# Altium PCB STM32F407ZGT6-尺寸图.PcbDoc
Units mm, origin at the board's own origin, x right, y up, seen from the top; angles counter-clockwise.
Board outline 74.56 x 102.5 mm, 2 copper layers (Top Layer, Bottom Layer); 33 components, 150 nets, 524 pads, 0 vias.
Unrouted connection lines stored in the file: 85.
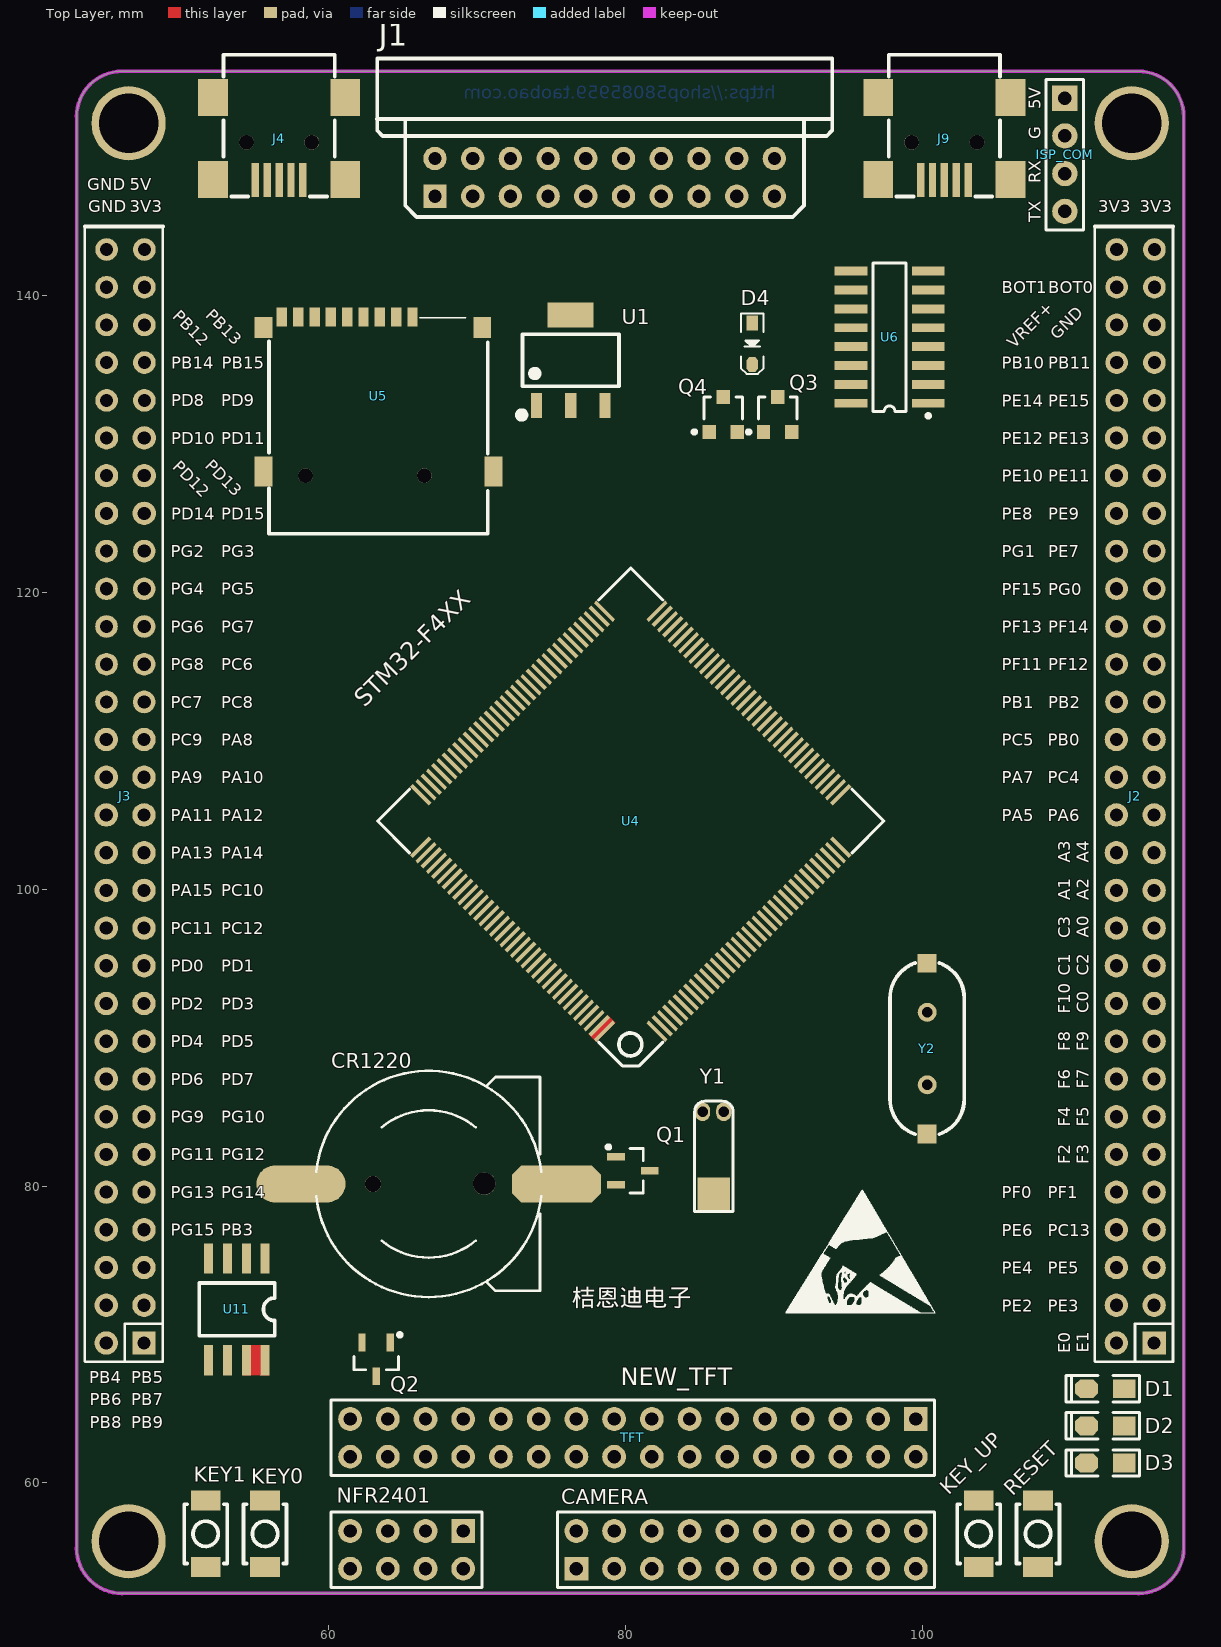
[diagram p0: Top Layer view]
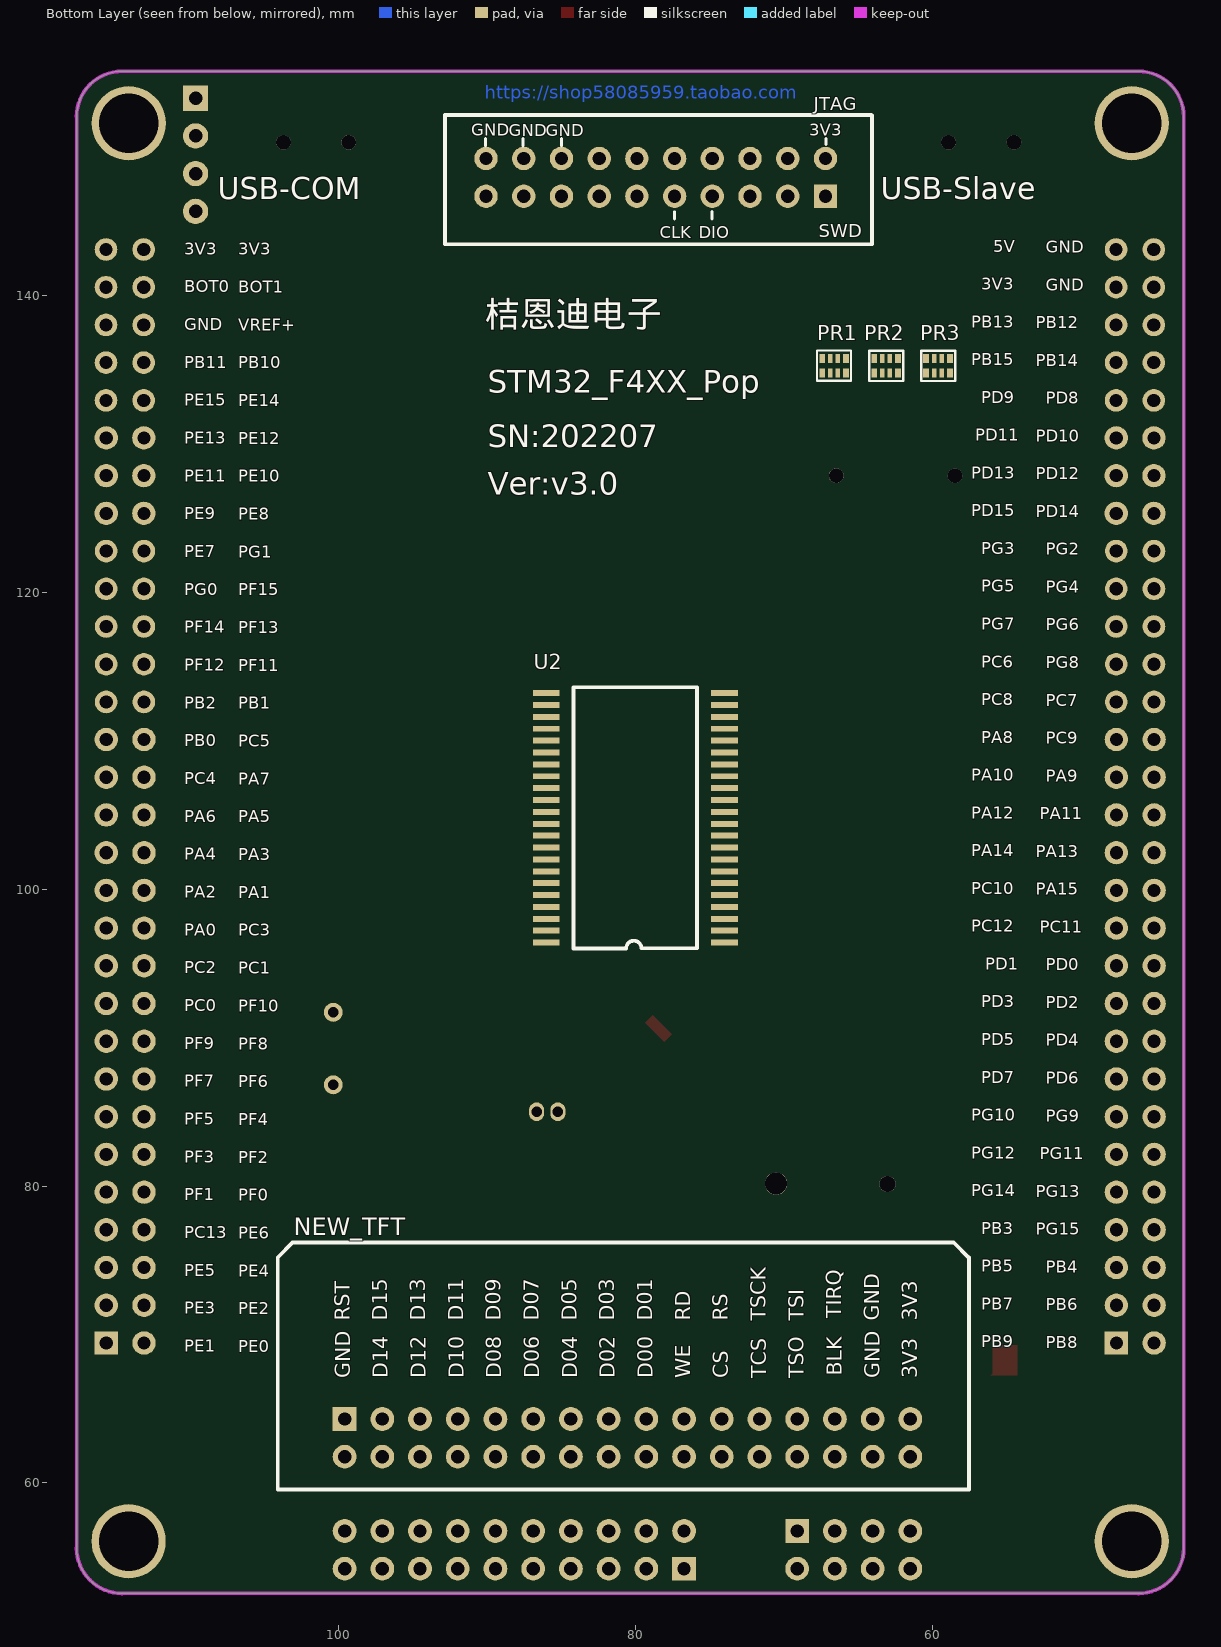
[diagram p1: Bottom Layer view, seen from below]

## Layer stack, top to bottom
Top Solder: solder mask 0.0102, Solder Resist, Dk 3.5
Top Layer: signal copper 0.0356
Dielectric 1: dielectric 0.32, FR-4, Dk 4.8
Bottom Layer: signal copper 0.0356
Bottom Solder: solder mask 0.0102, Solder Resist, Dk 3.5

## Board outline
43.053,55.617 43.053,152.017 cw(c46.103,152.017) 46.103,155.067 114.563,155.067 cw(c114.563,152.017) 117.613,152.017 117.613,55.617 cw(c114.563,55.617) 114.563,52.567 77.481,52.567 46.103,52.567 cw(c46.103,55.617)

## Design rules (kind name [scope] priority, off if disabled: settings)
Clearance [All] p1: gap=0.15 ignorepadtopadclearanceinfootprint=FALSE
ComponentClearance [All] p1: gap=0 collisioncheckmode=3 verticalgap=0 showdistances=FALSE
DiffPairsRouting [All] p1: maxlimit=0.254 minlimit=0.2 mostfreqgap=0.254 toplayer_minwidth=0.2 toplayer_maxwidth=10 toplayer_prefwidth=0.381 bottomlayer_minwidth=0.2 bottomlayer_maxwidth=10 bottomlayer_prefwidth=0.381 maxuncoupledlength=12.7
HoleSize [All] p1: absolutevalues=TRUE maxlimit=5 minlimit=0 maxpercent=80.000 minpercent=20.000
HoleToHoleClearance [All] p1: gap=0 allowstackedmicrovias=TRUE
MatchedLengths DiffPair_MatchedLengths [InDifferentialPair ('USB')] p1: tolerance=0.127 checknetsindiffpair=TRUE checkdiffpairvsdiffpair=FALSE checkxsignals=FALSE checkothers=FALSE
MatchedLengths DiffPair_USBMatchedLengths [InDifferentialPair ('USB')] p2: tolerance=0.127 checknetsindiffpair=TRUE checkdiffpairvsdiffpair=FALSE checkxsignals=FALSE checkothers=FALSE
MatchedLengths DiffPair_USBMatchedLengths_1 [InDifferentialPairClass('USB')] p3: tolerance=0.127 checknetsindiffpair=TRUE checkdiffpairvsdiffpair=FALSE checkxsignals=FALSE checkothers=FALSE
MinimumSolderMaskSliver [All] p1: minsoldermaskwidth=0
PolygonConnect [All] p1: thpad.connectstyle=Relief thpad.reliefconductorwidth=0.254 thpad.reliefentries=4 thpad.polygonreliefangle="90 Angle" thpad.airgapwidth=0.254 smdpad.connectstyle=Relief smdpad.reliefconductorwidth=0.254 smdpad.reliefentries=4 smdpad.polygonreliefangle="90 Angle" smdpad.airgapwidth=0.254 via.connectstyle=Direct via.reliefconductorwidth=0.254 via.reliefentries=4 via.polygonreliefangle="90 Angle" via.airgapwidth=0.254
RoutingVias [All] p1: holewidth=0.3 width=0.5 viastyle="Through Hole" minholewidth=0.3 minwidth=0.5 maxholewidth=0.5 maxwidth=0.8
SilkToSilkClearance [All] p1: silktosilkclearance=0
SilkToSolderMaskClearance [IsPad] p1: minsilkscreentomaskgap=0 clearancetoexposedcopper=TRUE
SolderMaskExpansion [All] p1: expansion=0.102 istentingtop=FALSE
Width [All] p1: maxlimit=2 minlimit=0.2 preferedwidth=0.25 minimp=50.000000 maximp=50.000000 favimp=50.000000
23 further rules are at their usual default settings.

## Classes and differential pairs
component class STM32F407ZGT6: CAMERA CR1220 D1 D2 D3 D4 ISP_COM J1 J2 J3 J4 J9 KEY0 KEY1 KEY_UP NFR2401 PR1 PR2 PR3 Q2 Q3 Q4 RESET TFT U1 U2 U5 U6 U11 Y1
differential pair USB: +USB_D+ -USB_D-
differential pair NewDifferentialPair1: +USB_D+ -5V

## Components (designator, comment, footprint, x,y, rotation, side; value= is the part's Value field where it differs from the comment)
CAMERA "Header 2X10" HDR-10X2 76.708,54.229 r0 top
CR1220 "BATT" BATM 66.76,80.137 r90 top
D1 "LED" "LED 0805B" 112.332,66.349 r180 top
D2 "LED" "LED 0805B" 112.332,63.849 r180 top
D3 "LED" "LED 0805B" 112.332,61.349 r180 top
D4 "1N4148" SOD-323 88.555,136.717 r270 top
ISP_COM "HDR-1X4" HDR-1X4 109.601,153.257 r270 top locked
J1 "JTAG" JTAG_20 78.613,147.923 r0 top locked
J2 "IO_30X2" PCBComponent_1 117.01,69.429 r90 top
J3 "IO_30X2" PCBComponent_1 48.99,69.429 r90 top
J4 "MiniUSB" MiniUSB 56.681,151.745 r180 top locked
J9 "MiniUSB" MiniUSB 101.478,151.745 r180 top locked
KEY0 "KEY0" "3*4 两脚开关" 55.742,54.328 r90 top
KEY1 "KEY0" "3*4 两脚开关" 51.742,54.328 r90 top
KEY_UP "KEY_UP" "3*4 两脚开关" 103.798,54.328 r90 top
NFR2401 "Header 4X2" HDR-4X2 69.088,56.769 r180 top
PR1 "4*1K" RCA-8P4R-0402 66.6,135.239 r0 bottom
PR2 "4*1K" RCA-8P4R-0402 63.1,135.239 r180 bottom
PR3 "4*1K" RCA-8P4R-0402 59.6,135.239 r180 bottom
Q1 "BAT54C" SOT23-3N 80.51,81.026 r270 top
Q2 "9012" SOT23-3N 63.222,68.326 r180 top
Q3 "9013" SOT-23R 90.26,131.826 r0 top
Q4 "9013" SOT-23R 86.598,131.826 r0 top
RESET "KEY_M" "3*4 两脚开关" 107.798,58.828 r270 top
TFT "J6" HDR-16X2 99.568,64.309 r180 top
U1 "AMS1117-3V3" SOT223_L 76.327,135.606 r0 top
U2 "SDRAM" TSOP44 73.996,96.393 r0 bottom
U4 "STM32F407ZGT6" LQFP144 82.131,90.437 r135 top
U5 "MiniSD" SD 55.631,128.12 r0 top locked
U6 "CH340G" SOP16M 97.798,137.16 r90 top
U11 "W25Q16" SOIC-8 55.753,75.126 r270 top
Y1 "32.768K" XTAL32 86.632,85.002 r270 top
Y2 "8MHz" XTAL_US 100.33,91.694 r270 top

## Footprints (in the part's own frame and the unit in brackets; to place one, negate y for a bottom-side part, rotate by r counter-clockwise, add the part's x,y. Pads: shape width x height; smd on the part's side, far side on the other; paste and mask are expansions set on the pad)
"3*4 两脚开关" [mm]
  rect 1.35x2 smd: 1(0,0) 2(4.5,0)
  silkscreen extent 0.25,-1.45 4.25,1.45
BATM [mm]
  round 1.1 hole 1.1 unplated: 0(0,3.748)
  round 1.5 hole 1.5 unplated: 0(0.025,-3.752)
  oct 2.5x6 smd: 1(0,-8.602)
  oval 2.5x6 smd: 2(0,8.598)
  silkscreen extent -7.62,-7.58 7.62,7.57
HDR-1X4 [mm] "排针，4脚"
  rect 1.7x1.7 hole 0.9: 1(0,0)
  round 1.7 hole 0.9: 2(2.54,0) 3(5.08,0) 4(7.62,0)
  silkscreen extent -1.27,-1.27 8.89,1.27, body extent -1.27,-1.27 8.89,1.27, height 8.5
HDR-4X2 [mm] "双排排针，4x2脚"
  rect 1.6x1.6 hole 0.9: 1(0,0)
  round 1.6 hole 0.9: 2(0,2.54) 3(2.54,0) 4(2.54,2.54) 5(5.08,0) 6(5.08,2.54) 7(7.62,0) 8(7.62,2.54)
  silkscreen extent -1.27,-1.27 8.89,3.81, body extent -1.27,-1.27 8.89,3.81, height 8.5
HDR-10X2 [mm] "双排排针，10x2脚"
  rect 1.6x1.6 hole 0.9: 1(0,0)
  round 1.6 hole 0.9: 2(0,2.54) 3(2.54,0) 4(2.54,2.54) 5(5.08,0) 6(5.08,2.54) 7(7.62,0) 8(7.62,2.54) 9(10.16,0) 10(10.16,2.54) 11(12.7,0) 12(12.7,2.54) 13(15.24,0) 14(15.24,2.54) 15(17.78,0) 16(17.78,2.54) 17(20.32,0) 18(20.32,2.54) 19(22.86,0) 20(22.86,2.54)
  silkscreen extent -1.27,-1.27 24.13,3.81, body extent -1.27,-1.27 24.13,3.81, height 8.5
HDR-16X2 [mm] "双排排针，16x2脚"
  rect 1.6x1.6 hole 0.9: 1(0,0)
  round 1.6 hole 0.9: 2(0,2.54) 3(2.54,0) 4(2.54,2.54) 5(5.08,0) 6(5.08,2.54) 7(7.62,0) 8(7.62,2.54) 9(10.16,0) 10(10.16,2.54) 11(12.7,0) 12(12.7,2.54) 13(15.24,0) 14(15.24,2.54) 15(17.78,0) 16(17.78,2.54) 17(20.32,0) 18(20.32,2.54) 19(22.86,0) 20(22.86,2.54) 21(25.4,0) 22(25.4,2.54) 23(27.94,0) 24(27.94,2.54) 25(30.48,0) 26(30.48,2.54) 27(33.02,0) 28(33.02,2.54) 29(35.56,0) 30(35.56,2.54) 31(38.1,0) 32(38.1,2.54)
  silkscreen extent -1.27,-1.27 39.37,3.81, body extent -1.27,-1.27 39.37,3.81, height 8.5
JTAG_20 [mil]
  rect 62x62 hole 35: 1(-450,-50)
  round 62 hole 35: 2(-450,50) 3(-350,-50) 4(-350,50) 5(-250,-50) 6(-250,50) 7(-150,-50) 8(-150,50) 9(-50,-50) 10(-50,50) 11(50,-50) 12(50,50) 13(150,-50) 14(150,50) 15(250,-50) 16(250,50) 17(350,-50) 18(350,50) 19(450,-50) 20(450,50)
  silkscreen extent -604,-105 604,315
"LED 0805B" [mil] "蓝色0805LED"
  rect 60x50 smd: 1(-50,0)
  oct 60x50 smd: 2(50,0)
  silkscreen extent -90,-35 105,35, body extent -39,-25 39,25, height 32
LQFP144 [mm]
  rect 1.8x0.254 smd: 1(-0.009,0.001) 2(-0.009,-0.499) 3(-0.009,-0.999) 4(-0.009,-1.499) 5(-0.009,-1.999) 6(-0.009,-2.499) 7(-0.009,-2.999) 8(-0.009,-3.499) 9(-0.009,-3.999) 10(-0.009,-4.499) 11(-0.009,-4.999) 12(-0.009,-5.499) 13(-0.009,-5.999) 14(-0.009,-6.499) 15(-0.009,-6.999) 16(-0.009,-7.499) 17(-0.009,-7.999) 18(-0.009,-8.499) 19(-0.009,-8.999) 20(-0.009,-9.499) 21(-0.009,-9.999) 22(-0.009,-10.499) 23(-0.009,-10.999) 24(-0.009,-11.499) 25(-0.009,-11.999) 26(-0.009,-12.499) 27(-0.009,-12.999) 28(-0.009,-13.499) 29(-0.009,-13.999) 30(-0.009,-14.499) 31(-0.009,-14.999) 32(-0.009,-15.499) 33(-0.009,-15.999) 34(-0.009,-16.499) 35(-0.009,-16.999) 36(-0.009,-17.499) 73(22.491,-17.499) 74(22.491,-16.999) 75(22.491,-16.499) 76(22.491,-15.999) 77(22.491,-15.499) 78(22.491,-14.999) 79(22.491,-14.499) 80(22.491,-13.999) 81(22.491,-13.499) 82(22.491,-12.999) 83(22.491,-12.499) 84(22.491,-11.999) 85(22.491,-11.499) 86(22.491,-10.999) 87(22.491,-10.499) 88(22.491,-9.999) 89(22.491,-9.499) 90(22.491,-8.999) 91(22.491,-8.499) 92(22.491,-7.999) 93(22.491,-7.499) 94(22.491,-6.999) 95(22.491,-6.499) 96(22.491,-5.999) 97(22.491,-5.499) 98(22.491,-4.999) 99(22.491,-4.499) 100(22.491,-3.999) 101(22.491,-3.499) 102(22.491,-2.999) 103(22.491,-2.499) 104(22.491,-1.999) 105(22.491,-1.499) 106(22.491,-0.999) 107(22.491,-0.499) 108(22.491,0.001)
  rect 0.254x1.8 smd: 37(2.491,-19.999) 38(2.991,-19.999) 39(3.491,-19.999) 40(3.991,-19.999) 41(4.491,-19.999) 42(4.991,-19.999) 43(5.491,-19.999) 44(5.991,-19.999) 45(6.491,-19.999) 46(6.991,-19.999) 47(7.491,-19.999) 48(7.991,-19.999) 49(8.491,-19.999) 50(8.991,-19.999) 51(9.491,-19.999) 52(9.991,-19.999) 53(10.491,-19.999) 54(10.991,-19.999) 55(11.491,-19.999) 56(11.991,-19.999) 57(12.491,-19.999) 58(12.991,-19.999) 59(13.491,-19.999) 60(13.991,-19.999) 61(14.491,-19.999) 62(14.991,-19.999) 63(15.491,-19.999) 64(15.991,-19.999) 65(16.491,-19.999) 66(16.991,-19.999) 67(17.491,-19.999) 68(17.991,-19.999) 69(18.491,-19.999) 70(18.991,-19.999) 71(19.491,-19.999) 72(19.991,-19.999) 109(19.991,2.501) 110(19.491,2.501) 111(18.991,2.501) 112(18.491,2.501) 113(17.991,2.501) 114(17.491,2.501) 115(16.991,2.501) 116(16.491,2.501) 117(15.991,2.501) 118(15.491,2.501) 119(14.991,2.501) 120(14.491,2.501) 121(13.991,2.501) 122(13.491,2.501) 123(12.991,2.501) 124(12.491,2.501) 125(11.991,2.501) 126(11.491,2.501) 127(10.991,2.501) 128(10.491,2.501) 129(9.991,2.501) 130(9.491,2.501) 131(8.991,2.501) 132(8.491,2.501) 133(7.991,2.501) 134(7.491,2.501) 135(6.991,2.501) 136(6.491,2.501) 137(5.991,2.501) 138(5.491,2.501) 139(4.991,2.501) 140(4.491,2.501) 141(3.991,2.501) 142(3.491,2.501) 143(2.991,2.501) 144(2.491,2.501)
  silkscreen extent -0.81,-20.8 23.29,3.3
MiniUSB [mm]
  rect 0.5x2.3 smd: 1(-1.611,4.005) 2(-0.811,4.005) 3(-0.011,4.005) 4(0.789,4.005) 5(1.589,4.005)
  rect 2x2.5 smd: 6(-4.461,-1.545) 7(-4.461,3.955) 8(4.439,-1.545) 9(4.439,3.955)
  round 1 hole 1 unplated: ""(-2.211,1.455) ""(2.189,1.455)
  silkscreen extent -3.76,-4.45 3.74,5.11
PCBComponent_1 [mil]
  rect 62x62 hole 35: 1(0,55)
  round 62 hole 35: 2(0,155) 3(100,55) 4(100,155) 5(200,55) 6(200,155) 7(300,55) 8(300,155) 9(400,55) 10(400,155) 11(500,55) 12(500,155) 13(600,55) 14(600,155) 15(700,55) 16(700,155) 17(800,55) 18(800,155) 19(900,55) 20(900,155) 21(1000,55) 22(1000,155) 23(1100,55) 24(1100,155) 25(1200,55) 26(1200,155) 27(1300,55) 28(1300,155) 29(1400,55) 30(1400,155) 31(1500,55) 32(1500,155) 33(1600,55) 34(1600,155) 45(2199.57,54.57) 46(2199.57,154.57) 47(2299.57,54.57) 48(2299.57,154.57) 49(2399.57,54.57) 50(2399.57,154.57)
  round 60 hole 35: 35(1699.57,54.57) 36(1699.57,154.57) 37(1799.57,54.57) 38(1799.57,154.57) 39(1899.57,54.57) 40(1899.57,154.57) 41(1999.57,54.57) 42(1999.57,154.57) 43(2099.57,54.57) 44(2099.57,154.57) 51(2499.15,54.15) 52(2499.15,154.15) 53(2599.15,54.15) 54(2599.15,154.15) 55(2699.15,54.15) 56(2699.15,154.15) 57(2799.15,54.15) 58(2799.15,154.15) 59(2899.15,54.15) 60(2899.15,154.15)
  silkscreen extent -50,5 2960,212
RCA-8P4R-0402 [mm] "2mm*1mm*0.45mm(长*宽*厚)"
  rect 0.4x0.6 smd: 1(-0.8,-0.5) 4(0.8,-0.5) 5(0.8,0.5) 8(-0.8,0.5)
  rect 0.3x0.6 smd: 2(-0.25,-0.5) 3(0.25,-0.5) 6(0.25,0.5) 7(-0.25,0.5)
  silkscreen extent -1.14,-1.02 1.15,1.01, body extent -1,-0.5 1,0.5, height 0.45
SD [mm]
  rect 0.7x1.3 smd: 1(10.039,10.4) 2(8.939,10.398) 3(7.843,10.4) 4(6.743,10.4) 5(5.644,10.4) 6(4.546,10.4) 7(3.45,10.4) 8(2.352,10.4) 9(1.248,10.4)
  rect 1.2x1.397 smd: 10(0,9.702) 13(14.732,9.702)
  rect 1.2x2 smd: 11(0,0) 12(15.494,0)
  round 1 hole 1 unplated: ""(2.832,-0.29) ""(10.831,-0.287)
  silkscreen extent 0.38,-4.2 15.11,10.34
SOD-323 [mm] "1.8x1.3X0.9mm（长宽高，不包括引脚）"
  rect 1x0.8 smd: 1(-1.4,0)
  oct 1x0.8 smd: 2(1.4,0)
  silkscreen extent -2.03,-0.76 2.03,0.76, body extent -1.34,-0.63 1.31,0.67, height 1
SOIC-8 [mil]
  rect 80x24 smd: 1(0,0) 2(0,-50.06) 3(0,-100.06) 4(0,-150.06) 5(270,-150) 6(270,-100) 7(270,-50) 8(270,0)
  silkscreen extent 65,-175 205,25
SOP16M [mm]
  rect 0.6x2.2 smd: 1(-4.445,-2.6) 2(-3.175,-2.6) 3(-1.905,-2.6) 4(-0.635,-2.6) 5(0.635,-2.6) 6(1.905,-2.6) 7(3.175,-2.6) 8(4.445,-2.6) 9(4.445,2.6) 10(3.175,2.6) 11(1.905,2.6) 12(0.635,2.6) 13(-0.635,2.6) 14(-1.905,2.6) 15(-3.175,2.6) 16(-4.445,2.6)
  silkscreen extent -5.42,-2.72 5,1.1
SOT23-3N [mm] "3x1.3x1mm(长宽高)"
  rect 0.5x1.2 smd: 1(-0.95,-1.143) 2(0.95,-1.143) 3(0,1.143)
  silkscreen extent -1.72,-1.78 1.5,0.7, body extent -1.5,-1.2 1.5,1.2, height 1.05
SOT223_L [mm] "6.4x7x1.6mm(长宽高)"
  rect 0.75x1.7 smd: 1(-2.3,-3.048) 2(0,-3.048) 3(2.3,-3.048)
  rect 3.1x1.7 smd: 2(0,3.048)
  silkscreen extent -3.5,-3.88 3.25,1.75, body extent -3.25,-3.51 3.25,3.51, height 1.65
SOT-23R [mm]
  rect 0.9x0.95 smd: 1(0.95,-1.048) 2(-0.95,-1.048) 3(0,1.302)
  silkscreen extent -2.07,-1.17 1.3,1.3
TSOP44 [mm]
  rect 1.8x0.4 smd: 1(-0.009,0.001) 2(-0.009,-0.799) 3(-0.009,-1.599) 4(-0.009,-2.399) 5(-0.009,-3.199) 6(-0.009,-3.999) 7(-0.009,-4.799) 8(-0.009,-5.599) 9(-0.009,-6.399) 10(-0.009,-7.199) 11(-0.009,-7.999) 12(-0.009,-8.799) 13(-0.009,-9.599) 14(-0.009,-10.399) 15(-0.009,-11.199) 16(-0.009,-11.999) 17(-0.009,-12.799) 18(-0.009,-13.599) 19(-0.009,-14.399) 20(-0.009,-15.199) 21(-0.009,-15.999) 22(-0.009,-16.799) 23(11.991,-16.799) 24(11.991,-15.999) 25(11.991,-15.199) 26(11.991,-14.399) 27(11.991,-13.599) 28(11.991,-12.799) 29(11.991,-11.999) 30(11.991,-11.199) 31(11.991,-10.399) 32(11.991,-9.599) 33(11.991,-8.799) 34(11.991,-7.999) 35(11.991,-7.199) 36(11.991,-6.399) 37(11.991,-5.599) 38(11.991,-4.799) 39(11.991,-3.999) 40(11.991,-3.199) 41(11.991,-2.399) 42(11.991,-1.599) 43(11.991,-0.799) 44(11.991,0.001)
  silkscreen extent 1.83,-17.2 10.16,0.4
XTAL32 [mil]
  oval 50x40 hole 28: 1(0,0) 2(0,-56)
  rect 92.13x86 smd: ""(220,-27)
  silkscreen extent -28,-77 264,25
XTAL_US [mil]
  round 50 hole 28: 1(0,0) 2(192.13,0)
  rect 50x50 smd: ""(-130.32,0) ""(322.44,0)
  silkscreen extent -131,-98 323,98

## Part data
CAMERA: library part "Header 10X2", "10*2P接插件"
CR1220: library part BAT
D1 D2 D3: library part LED2, "Typical RED, GREEN, YELLOW, AMBER GaAs LED", PackageDocument=Feb-2002, LatestRevisionDate=17-Jul-2002, LatestRevisionNote="Re-released for DXP Platform.", PackageReference=3.2X1.6X1.1, Published=8-Jun-2000, Publisher="Altium Limited"
D4: library part D
ISP_COM: library part "Header 4", "4P接插件"
J2 J3: library part 30*2PIN
KEY0 KEY1 KEY_UP: library part KEY_M
NFR2401: "4*2P接插件"
PR1 PR2 PR3: library part R-8P4R, "贴片网络排阻"
Q2: library part 9012-SMD, "低频放大-PNP型"
Q3 Q4: library part NPN, "8050/BCW846/BCW847"
TFT: library part "Header 16X2", "16*2P接插件"
U1: library part AMS1117, "三端稳压芯片"
U4: library part STM32F407ZET6, "STM32F407ZET6"
U5: library part SD
U6: "USB2UART"
U11: library part W25X16, "W25X16;SST25VF016;MX25L1605"
Y1: library part XTAL_1, "Crystal Oscillator", LatestRevisionDate=17-Jul-2002, LatestRevisionNote="Re-released for DXP Platform.", Published=8-Jun-2000, Publisher="Altium Limited"
Y2: library part XTAL, "Crystal Oscillator", LatestRevisionDate=17-Jul-2002, LatestRevisionNote="Re-released for DXP Platform.", Published=8-Jun-2000, Publisher="Altium Limited"

## Free pads (board coordinates)
  round 5 hole 4: 0(46.553,56.078) 0(46.553,151.567) 0(114.102,151.567) 0(114.113,56.078)

## Nets (pads, with @x,y where several pads share a name; then routed paths per layer and width w, separated by ;. In a path a pad name is that pad's centre, name@x,y a point inside that pad or via, vN(x,y) a via of type N, cw(c..) or ccw(c..) an arc to the next point about the centre after c; other vN are vias at no path point)
3.3V: 
5V: 
BOOT0: 
DCMI_CH1: 
DCMI_D0: 
DCMI_D1: 
DCMI_D2: 
DCMI_D3: 
DCMI_D4: 
DCMI_D5: 
DCMI_D6: 
DCMI_D7: 
DCMI_HREF: 
DCMI_PCLK: 
DCMI_PWDN: 
DCMI_RESET: 
DCMI_SCL: 
DCMI_SDA: 
DCMI_VSYNC: 
DCMI_XCLK: 
EXG: 
F_CS: 
FSMC_A0: 
FSMC_A1: 
FSMC_A2: 
FSMC_A3: 
FSMC_A4: 
FSMC_A5: 
FSMC_A6: 
FSMC_A7: 
FSMC_A8: 
FSMC_A9: 
FSMC_A10: 
FSMC_A11: 
FSMC_A12: 
FSMC_A13: 
FSMC_A14: 
FSMC_A15: 
FSMC_A16: 
FSMC_A17: 
FSMC_A18: 
FSMC_D0: 
FSMC_D1: 
FSMC_D2: 
FSMC_D3: 
FSMC_D4: 
FSMC_D5: 
FSMC_D6: 
FSMC_D7: 
FSMC_D8: 
FSMC_D9: 
FSMC_D10: 
FSMC_D11: 
FSMC_D12: 
FSMC_D13: 
FSMC_D14: 
FSMC_D15: 
FSMC_NBL0: 
FSMC_NBL1: 
FSMC_NE3: 
FSMC_NE4: 
FSMC_NOE: 
FSMC_NWE: 
GND: 
KEY0: 
KEY1: 
LCD_BL: 
LED0: 
LED1: 
NetC9_2: 
NetC10_2: 
NetC11_1: 
NetC12_1: 
NetC36_2: 
NetC37_2: 
NetC38_2: 
NetCR1220_1: 
NetD1_2: 
NetD2_2: 
NetD3_2: 
NetD4_2: 
NetJ2_57: 
NetJ4_2: 
NetJ4_3: 
NetJ9_1: 
NetQ2_1: 
NetQ2_3: 
NetQ3_2: 
NetQ4_1: 
NetQ4_2: 
NetR17_1: 
NetR38_1: 
NRF_CE: 
NRF_CS: 
NRF_IRQ: 
PA0/WK_UP: 
PA1: 
PA2: 
PA3: 
PA5: 
PA7: 
PA9/TXD1: 
PA10/RXD1: 
"PA11/USB DM": 
PA12/USB_DP: 
PA13/TMS: 
PA14/TCK: 
PA15/TD1: 
PB0: 
PB1: 
PB2/BOOT1: 
PB3/TDO: 
PB4/TRST: 
PB5: 
PB10: 
PB11: 
PB12: 
PB13: 
PC0: 
PC1: 
PC2: 
PC3: 
PC4: 
PC5: 
PC10: 
PC12: 
PC13: 
PC14: 
PC15: 
PD2: 
PD3: 
PE2: 
PE3: 
PE4: 
PF6: 
PF7: 
PF11: 
PG11: 
PG13: 
PG14: 
RST: 
SD_NC: 
U_RXD: 
U_TXD: 
"USB 5V": 
USB_D+: 
USB_D-: 
VBAT: 
VDDA: 
VREF+: 
pads on no net: CAMERA.1 CAMERA.2 CAMERA.3 CAMERA.4 CAMERA.5 CAMERA.6 CAMERA.7 CAMERA.8 CAMERA.9 CAMERA.10 CAMERA.11 CAMERA.12 CAMERA.13 CAMERA.14 CAMERA.15 CAMERA.16 CAMERA.17 CAMERA.18 CAMERA.19 CAMERA.20 CR1220.0 CR1220.1 CR1220.2 D1.1 D1.2 D2.1 D2.2 D3.1 D3.2 D4.1 D4.2 ISP_COM.1 ISP_COM.2 ISP_COM.3 ISP_COM.4 J1.1 J1.2 J1.3 J1.4 J1.5 J1.6 J1.7 J1.8 J1.9 J1.10 J1.11 J1.12 J1.13 J1.14 J1.15 J1.16 J1.17 J1.18 J1.19 J1.20 J2.1 J2.2 J2.3 J2.4 J2.5 J2.6 J2.7 J2.8 J2.9 J2.10 J2.11 J2.12 J2.13 J2.14 J2.15 J2.16 J2.17 J2.18 J2.19 J2.20 J2.21 J2.22 J2.23 J2.24 J2.25 J2.26 J2.27 J2.28 J2.29 J2.30 J2.31 J2.32 J2.33 J2.34 J2.35 J2.36 J2.37 J2.38 J2.39 J2.40 J2.41 J2.42 J2.43 J2.44 J2.45 J2.46 J2.47 J2.48 J2.49 J2.50 J2.51 J2.52 J2.53 J2.54 J2.55 J2.56 J2.57 J2.58 J2.59 J2.60 J3.1 J3.2 J3.3 J3.4 J3.5 J3.6 J3.7 J3.8 J3.9 J3.10 J3.11 J3.12 J3.13 J3.14 J3.15 J3.16 J3.17 J3.18 J3.19 J3.20 J3.21 J3.22 J3.23 J3.24 J3.25 J3.26 J3.27 J3.28 J3.29 J3.30 J3.31 J3.32 J3.33 J3.34 J3.35 J3.36 J3.37 J3.38 J3.39 J3.40 J3.41 J3.42 J3.43 J3.44 J3.45 J3.46 J3.47 J3.48 J3.49 J3.50 J3.51 J3.52 J3.53 J3.54 J3.55 J3.56 J3.57 J3.58 J3.59 J3.60 J4. J4.1 J4.2 J4.3 J4.4 J4.5 J4.6 J4.7 J4.8 J4.9 J9. J9.1 J9.2 J9.3 J9.4 J9.5 J9.6 J9.7 J9.8 J9.9 KEY0.1 KEY0.2 KEY1.1 KEY1.2 KEY_UP.1 KEY_UP.2 NFR2401.1 NFR2401.2 NFR2401.3 NFR2401.4 NFR2401.5 NFR2401.6 NFR2401.7 NFR2401.8 PR1.1 PR1.2 PR1.3 PR1.4 PR1.5 PR1.6 PR1.7 PR1.8 PR2.1 PR2.2 PR2.3 PR2.4 PR2.5 PR2.6 PR2.7 PR2.8 PR3.1 PR3.2 PR3.3 PR3.4 PR3.5 PR3.6 PR3.7 PR3.8 Q1.1 Q1.2 Q1.3 Q2.1 Q2.2 Q2.3 Q3.1 Q3.2 Q3.3 Q4.1 Q4.2 Q4.3 RESET.1 RESET.2 TFT.1 TFT.2 TFT.3 TFT.4 TFT.5 TFT.6 TFT.7 TFT.8 TFT.9 TFT.10 TFT.11 TFT.12 TFT.13 TFT.14 TFT.15 TFT.16 TFT.17 TFT.18 TFT.19 TFT.20 TFT.21 TFT.22 TFT.23 TFT.24 TFT.25 TFT.26 TFT.27 TFT.28 TFT.29 TFT.30 TFT.31 TFT.32 U1.1 U1.2 U1.3 U2.1 U2.2 U2.3 U2.4 U2.5 U2.6 U2.7 U2.8 U2.9 U2.10 U2.11 U2.12 U2.13 U2.14 U2.15 U2.16 U2.17 U2.18 U2.19 U2.20 U2.21 U2.22 U2.23 U2.24 U2.25 U2.26 U2.27 U2.28 U2.29 U2.30 U2.31 U2.32 U2.33 U2.34 U2.35 U2.36 U2.37 U2.38 U2.39 U2.40 U2.41 U2.42 U2.43 U2.44 U4.1 U4.2 U4.3 U4.4 U4.5 U4.6 U4.7 U4.8 U4.9 U4.10 U4.11 U4.12 U4.13 U4.14 U4.15 U4.16 U4.17 U4.18 U4.19 U4.20 U4.21 U4.22 U4.23 U4.24 U4.25 U4.26 U4.27 U4.28 U4.29 U4.30 U4.31 U4.32 U4.33 U4.34 U4.35 U4.36 U4.37 U4.38 U4.39 U4.40 U4.41 U4.42 U4.43 U4.44 U4.45 U4.46 U4.47 U4.48 U4.49 U4.50 U4.51 U4.52 U4.53 U4.54 U4.55 U4.56 U4.57 U4.58 U4.59 U4.60 U4.61 U4.62 U4.63 U4.64 U4.65 U4.66 U4.67 U4.68 U4.69 U4.70 U4.71 U4.72 U4.73 U4.74 U4.75 U4.76 U4.77 U4.78 U4.79 U4.80 U4.81 U4.82 U4.83 U4.84 U4.85 U4.86 U4.87 U4.88 U4.89 U4.90 U4.91 U4.92 U4.93 U4.94 U4.95 U4.96 U4.97 U4.98 U4.99 U4.100 U4.101 U4.102 U4.103 U4.104 U4.105 U4.106 U4.107 U4.108 U4.109 U4.110 U4.111 U4.112 U4.113 U4.114 U4.115 U4.116 U4.117 U4.118 U4.119 U4.120 U4.121 U4.122 U4.123 U4.124 U4.125 U4.126 U4.127 U4.128 U4.129 U4.130 U4.131 U4.132 U4.133 U4.134 U4.135 U4.136 U4.137 U4.138 U4.139 U4.140 U4.141 U4.142 U4.143 U4.144 U5. U5.1 U5.2 U5.3 U5.4 U5.5 U5.6 U5.7 U5.8 U5.9 U5.10 U5.11 U5.12 U5.13 U6.1 U6.2 U6.3 U6.4 U6.5 U6.6 U6.7 U6.8 U6.9 U6.10 U6.11 U6.12 U6.13 U6.14 U6.15 U6.16 U11.1 U11.2 U11.3 U11.4 U11.5 U11.6 U11.7 U11.8 Y1. Y1.1 Y1.2 Y2. Y2.1 Y2.2

## Keep-outs
Keep-Out Layer:
  lines w0.25: 43.053,55.617 43.053,152.017 ; 46.103,52.567 114.563,52.567 ; 46.103,155.067 114.563,155.067 ; 117.613,55.617 117.613,152.017
  lines w0.254: 43.053,55.617 ccw(c46.103,55.617) 46.103,52.567 ; 43.053,152.017 cw(c46.103,152.017) 46.103,155.067 ; 114.563,52.567 ccw(c114.563,55.617) 117.613,55.617 ; 114.563,155.067 cw(c114.563,152.017) 117.613,152.017

## Other copper
Top Layer:
  region net 3.3V: 78.807,91.5 79.313,90.994 78.049,89.716 77.541,90.229
  region net 3.3V: 54.26,69.282 54.26,67.25 56.038,67.25 55.923,67.365 55.923,69.282
Bottom Layer:
  text "https://shop58085959.taobao.com" at 90.135,152.916 h1.5

## Silkscreen, mask and mechanical layers (free items; w line width, h text height)
Top Overlay:
  drawing of 893 lines, arcs and shapes, not listed
  text "5V" at 107.988,152.501 h0.8 r90
  text "G" at 107.988,150.5 h0.8 r90
  text "RX" at 107.988,147.535 h0.8 r90
  text "GND" at 43.778,147.067 h0.8
  text "5V" at 46.636,147.069 h0.8
  text "GND" at 43.838,145.565 h0.8
  text "3V3" at 46.617,145.558 h0.8
  text "3V3" at 111.858,145.565 h0.8
  text "3V3" at 114.637,145.558 h0.8
  text "TX" at 107.988,144.896 h0.8 r90
  text "BOT1" at 105.361,140.107 h0.8
  text "BOT0" at 108.488,140.107 h0.8
  text "PB13" at 51.666,138.584 h0.8 r315
  text "PB12" at 49.473,138.511 h0.8 r315
  text "GND" at 109.083,136.93 h0.8 r45
  text "VREF+" at 106.19,136.364 h0.8 r45
  text "PB14" at 49.422,135.027 h0.8
  text "PB15" at 52.816,135.027 h0.8
  text "PB10" at 105.361,135.027 h0.8
  text "PB11" at 108.488,135.027 h0.8
  text "PD8" at 49.411,132.498 h0.8
  text "PD9" at 52.805,132.498 h0.8
  text "PE14" at 105.361,132.487 h0.8
  text "PE15" at 108.488,132.487 h0.8
  text "PD10" at 49.411,129.958 h0.8
  text "PD11" at 52.805,129.958 h0.8
  text "PE12" at 105.35,129.958 h0.8
  text "PE13" at 108.477,129.958 h0.8
  text "PD13" at 51.644,128.435 h0.8 r315
  text "PD12" at 49.452,128.362 h0.8 r315
  text "PE10" at 105.35,127.418 h0.8
  text "PE11" at 108.477,127.418 h0.8
  text "PD14" at 49.411,124.878 h0.8
  text "PD15" at 52.805,124.878 h0.8
  text "PE8" at 105.35,124.878 h0.8
  text "PE9" at 108.477,124.878 h0.8
  text "PG2" at 49.401,122.348 h0.8
  text "PG3" at 52.794,122.348 h0.8
  text "PG1" at 105.35,122.338 h0.8
  text "PE7" at 108.477,122.338 h0.8
  text "PG4" at 49.401,119.808 h0.8
  text "PG5" at 52.794,119.808 h0.8
  text "PF15" at 105.35,119.798 h0.8
  text "PG0" at 108.477,119.798 h0.8
  text "PG6" at 49.401,117.268 h0.8
  text "PG7" at 52.794,117.268 h0.8
  text "PF13" at 105.35,117.258 h0.8
  text "PF14" at 108.477,117.258 h0.8
  text "PG8" at 49.401,114.728 h0.8
  text "PC6" at 52.794,114.728 h0.8
  text "PF11" at 105.35,114.718 h0.8
  text "PF12" at 108.477,114.718 h0.8
  text "PC7" at 49.401,112.188 h0.8
  text "PC8" at 52.794,112.188 h0.8
  text "PB1" at 105.35,112.178 h0.8
  text "PB2" at 108.477,112.178 h0.8
  text "STM32-F4XX" at 62.738,111.919 h2 r45
  text "PC9" at 49.39,109.659 h0.8
  text "PA8" at 52.783,109.659 h0.8
  text "PC5" at 105.339,109.648 h0.8
  text "PB0" at 108.466,109.648 h0.8
  text "PA9" at 49.39,107.119 h0.8
  text "PA10" at 52.783,107.119 h0.8
  text "PA7" at 105.339,107.108 h0.8
  text "PC4" at 108.466,107.108 h0.8
  text "PA11" at 49.39,104.579 h0.8
  text "PA12" at 52.783,104.579 h0.8
  text "PA5" at 105.339,104.568 h0.8
  text "PA6" at 108.466,104.568 h0.8
  text "PA13" at 49.39,102.039 h0.8
  text "PA14" at 52.783,102.039 h0.8
  text "A3" at 109.952,101.77 h0.8 r90
  text "A4" at 111.211,101.782 h0.8 r90
  text "PA15" at 49.39,99.499 h0.8
  text "PC10" at 52.783,99.499 h0.8
  text "A1" at 109.952,99.23 h0.8 r90
  text "A2" at 111.211,99.242 h0.8 r90
  text "PC11" at 49.39,96.959 h0.8
  text "PC12" at 52.783,96.959 h0.8
  text "C3" at 109.952,96.69 h0.8 r90
  text "A0" at 111.211,96.702 h0.8 r90
  text "PD0" at 49.39,94.419 h0.8
  text "PD1" at 52.783,94.419 h0.8
  text "C1" at 109.952,94.15 h0.8 r90
  text "C2" at 111.211,94.162 h0.8 r90
  text "PD2" at 49.39,91.879 h0.8
  text "PD3" at 52.783,91.879 h0.8
  text "F10" at 109.952,91.61 h0.8 r90
  text "C0" at 111.211,91.622 h0.8 r90
  text "PD4" at 49.39,89.339 h0.8
  text "PD5" at 52.783,89.339 h0.8
  text "F8" at 109.952,89.07 h0.8 r90
  text "F9" at 111.211,89.082 h0.8 r90
  text "PD6" at 49.39,86.799 h0.8
  text "PD7" at 52.783,86.799 h0.8
  text "F6" at 109.952,86.53 h0.8 r90
  text "F7" at 111.211,86.542 h0.8 r90
  text "PG9" at 49.39,84.259 h0.8
  text "PG10" at 52.783,84.259 h0.8
  text "F4" at 109.952,83.99 h0.8 r90
  text "F5" at 111.211,84.002 h0.8 r90
  text "PG11" at 49.39,81.719 h0.8
  text "PG12" at 52.783,81.719 h0.8
  text "F2" at 109.952,81.45 h0.8 r90
  text "F3" at 111.211,81.462 h0.8 r90
  text "PG13" at 49.39,79.179 h0.8
  text "PG14" at 52.783,79.179 h0.8
  text "PF0" at 105.339,79.168 h0.8
  text "PF1" at 108.466,79.168 h0.8
  text "PG15" at 49.39,76.639 h0.8
  text "PB3" at 52.783,76.639 h0.8
  text "PE6" at 105.339,76.628 h0.8
  text "PC13" at 108.466,76.628 h0.8
  text "PE4" at 105.339,74.088 h0.8
  text "PE5" at 108.466,74.088 h0.8
  text "PE2" at 105.339,71.548 h0.8
  text "PE3" at 108.466,71.548 h0.8
  text "桔恩迪电子" at 76.408,71.503 h2
  text "E0" at 109.952,68.75 h0.8 r90
  text "E1" at 111.211,68.762 h0.8 r90
  text "PB4" at 43.888,66.731 h0.8
  text "PB5" at 46.746,66.733 h0.8
  text "NEW_TFT" at 79.693,66.166 h2
  text "PB6" at 43.947,65.229 h0.8
  text "PB7" at 46.726,65.223 h0.8
  text "PB8" at 43.947,63.682 h0.8
  text "PB9" at 46.726,63.676 h0.8
Bottom Overlay:
  lines w0.2: 67.138,150.148 67.141,150.54 ; 74.814,145.126 74.817,145.626 ; 77.341,145.108 77.345,145.608 ; 84.945,150.04 84.948,150.54 ; 87.546,150.04 87.55,150.54 ; 90.074,150.04 90.078,150.54
  lines w0.254: 57.513,59.565 104.073,59.565 ; 57.517,75.154 58.55,76.187 103.074,76.187 104.073,75.188 104.073,59.619 ; 57.518,59.612 57.518,75.18 ; 64.044,152.107 64.044,143.421 92.8,143.421 92.8,152.121 ; 64.098,152.121 92.778,152.121
  text "JTAG" at 67.966,152.153 h1.52
  text "3V3" at 68.268,150.717 h0.8
  text "GND" at 91.024,150.717 h0.8
  text "GND" at 86.03,150.695 h0.8
  text "GND" at 88.496,150.695 h0.8
  text "USB-Slave" at 63.469,145.957 h2.54
  text "USB-COM" at 108.118,145.957 h2.54
  text "DIO" at 75.708,143.837 h0.8
  text "CLK" at 78.351,143.837 h0.8
  text "SWD" at 67.624,143.595 h1.5
  text "5V" at 55.895,142.897 h0.8
  text "GND" at 52.35,142.846 h0.8
  text "3V3" at 110.363,142.725 h0.8
  text "3V3" at 106.736,142.699 h0.8
  text "3V3" at 56.695,140.353 h0.8
  text "GND" at 52.35,140.303 h0.8
  text "BOT0" at 110.363,140.177 h0.8
  text "BOT1" at 106.736,140.151 h0.8
  text "PB13" at 57.361,137.81 h0.8
  text "PB12" at 53.016,137.759 h0.8
  text "GND" at 110.363,137.629 h0.8
  text "VREF+" at 106.736,137.603 h0.8
  text "桔恩迪电子" at 90.135,137.287 h3
  text "PB15" at 57.361,135.266 h0.8
  text "PB14" at 53.016,135.215 h0.8
  text "PB11" at 110.363,135.082 h0.8
  text "PB10" at 106.736,135.055 h0.8
  text "STM32_F4XX_Pop" at 89.93,133.427 h1.52
  text "PD9" at 56.695,132.722 h0.8
  text "PD8" at 52.35,132.672 h0.8
  text "PE15" at 110.363,132.534 h0.8
  text "PE14" at 106.736,132.507 h0.8
  text "PD11" at 57.094,130.179 h0.8
  text "PD10" at 53.016,130.128 h0.8
  text "PE13" at 110.363,129.986 h0.8
  text "PE12" at 106.736,129.96 h0.8
  text "SN:202207" at 89.93,129.743 h1.52
  text "PD13" at 57.361,127.635 h0.8
  text "PD12" at 53.016,127.584 h0.8
  text "PE11" at 110.363,127.438 h0.8
  text "PE10" at 106.736,127.412 h0.8
  text "Ver:v3.0" at 89.93,126.568 h1.52
  text "PD15" at 57.361,125.091 h0.8
  text "PD14" at 53.016,125.041 h0.8
  text "PE9" at 110.363,124.89 h0.8
  text "PE8" at 106.736,124.864 h0.8
  text "PG3" at 56.695,122.548 h0.8
  text "PG2" at 52.35,122.497 h0.8
  text "PE7" at 110.363,122.342 h0.8
  text "PG1" at 106.736,122.316 h0.8
  text "PG5" at 56.695,120.004 h0.8
  text "PG4" at 52.35,119.953 h0.8
  text "PG0" at 110.363,119.794 h0.8
  text "PF15" at 106.736,119.768 h0.8
  text "PG7" at 56.695,117.461 h0.8
  text "PG6" at 52.35,117.41 h0.8
  text "PF14" at 110.363,117.246 h0.8
  text "PF13" at 106.736,117.22 h0.8
  text "PC6" at 56.695,114.917 h0.8
  text "PG8" at 52.35,114.866 h0.8
  text "PF12" at 110.363,114.698 h0.8
  text "PF11" at 106.736,114.672 h0.8
  text "PC8" at 56.695,112.373 h0.8
  text "PC7" at 52.35,112.322 h0.8
  text "PB2" at 110.363,112.15 h0.8
  text "PB1" at 106.736,112.124 h0.8
  text "PA8" at 56.695,109.83 h0.8
  text "PC9" at 52.35,109.779 h0.8
  text "PB0" at 110.363,109.602 h0.8
  text "PC5" at 106.736,109.576 h0.8
  text "PA10" at 57.361,107.286 h0.8
  text "PA9" at 52.35,107.235 h0.8
  text "PC4" at 110.363,107.054 h0.8
  text "PA7" at 106.736,107.028 h0.8
  text "PA12" at 57.361,104.742 h0.8
  text "PA11" at 52.75,104.692 h0.8
  text "PA6" at 110.363,104.506 h0.8
  text "PA5" at 106.736,104.48 h0.8
  text "PA14" at 57.361,102.199 h0.8
  text "PA13" at 53.016,102.148 h0.8
  text "PA4" at 110.363,101.958 h0.8
  text "PA3" at 106.736,101.932 h0.8
  text "PC10" at 57.361,99.655 h0.8
  text "PA15" at 53.016,99.604 h0.8
  text "PA2" at 110.363,99.41 h0.8
  text "PA1" at 106.736,99.384 h0.8
  text "PC12" at 57.361,97.111 h0.8
  text "PC11" at 52.75,97.061 h0.8
  text "PA0" at 110.363,96.862 h0.8
  text "PC3" at 106.736,96.836 h0.8
  text "PD1" at 56.428,94.568 h0.8
  text "PD0" at 52.35,94.517 h0.8
  text "PC2" at 110.363,94.315 h0.8
  text "PC1" at 106.736,94.288 h0.8
  text "PD3" at 56.695,92.024 h0.8
  text "PD2" at 52.35,91.973 h0.8
  text "PC0" at 110.363,91.767 h0.8
  text "PF10" at 106.736,91.74 h0.8
  text "PD5" at 56.695,89.48 h0.8
  text "PD4" at 52.35,89.43 h0.8
  text "PF9" at 110.363,89.219 h0.8
  text "PF8" at 106.736,89.193 h0.8
  text "PD7" at 56.695,86.937 h0.8
  text "PD6" at 52.35,86.886 h0.8
  text "PF7" at 110.363,86.671 h0.8
  text "PF6" at 106.736,86.645 h0.8
  text "PG10" at 57.361,84.393 h0.8
  text "PG9" at 52.35,84.342 h0.8
  text "PF5" at 110.363,84.123 h0.8
  text "PF4" at 106.736,84.097 h0.8
  text "PG12" at 57.361,81.849 h0.8
  text "PG11" at 52.75,81.799 h0.8
  text "PF3" at 110.363,81.575 h0.8
  text "PF2" at 106.736,81.549 h0.8
  text "PG14" at 57.361,79.306 h0.8
  text "PG13" at 53.016,79.255 h0.8
  text "PF1" at 110.363,79.027 h0.8
  text "PF0" at 106.736,79.001 h0.8
  text "PB3" at 56.695,76.762 h0.8
  text "PG15" at 53.016,76.711 h0.8
  text "PC13" at 110.363,76.479 h0.8
  text "PE6" at 106.736,76.453 h0.8
  text "NEW_TFT" at 103.005,76.289 h2
  text "PB5" at 56.695,74.218 h0.8
  text "PB4" at 52.35,74.168 h0.8
  text "PE5" at 110.363,73.931 h0.8
  text "PE4" at 106.736,73.905 h0.8
  text "PB7" at 56.695,71.675 h0.8
  text "PB6" at 52.35,71.624 h0.8
  text "PE3" at 110.363,71.383 h0.8
  text "PE2" at 106.736,71.357 h0.8
  text "TIRQ" at 66.114,71.098 h1 r270
  text "3V3" at 61.019,70.922 h1 r270
  text "GND" at 63.566,70.922 h1 r270
  text "TSI" at 68.661,70.922 h1 r270
  text "TSCK" at 71.208,70.922 h1 r270
  text "RS" at 73.756,70.922 h1 r270
  text "RD" at 76.303,70.922 h1 r270
  text "D01" at 78.85,70.922 h1 r270
  text "D03" at 81.398,70.922 h1 r270
  text "D05" at 83.945,70.922 h1 r270
  text "D07" at 86.493,70.922 h1 r270
  text "D09" at 89.04,70.922 h1 r270
  text "D11" at 91.587,70.922 h1 r270
  text "D13" at 94.135,70.922 h1 r270
  text "D15" at 96.682,70.922 h1 r270
  text "RST" at 99.229,70.922 h1 r270
  text "PB9" at 56.695,69.131 h0.8
  text "PB8" at 52.35,69.08 h0.8
  text "PE1" at 110.363,68.835 h0.8
  text "PE0" at 106.736,68.809 h0.8
  text "BLK" at 66.084,67.226 h1 r270
  text "3V3" at 60.989,67.05 h1 r270
  text "GND" at 63.537,67.05 h1 r270
  text "TSO" at 68.632,67.05 h1 r270
  text "TCS" at 71.179,67.05 h1 r270
  text "CS" at 73.726,67.05 h1 r270
  text "WE" at 76.274,67.05 h1 r270
  text "D00" at 78.821,67.05 h1 r270
  text "D02" at 81.368,67.05 h1 r270
  text "D04" at 83.916,67.05 h1 r270
  text "D06" at 86.463,67.05 h1 r270
  text "D08" at 89.011,67.05 h1 r270
  text "D10" at 91.558,67.05 h1 r270
  text "D12" at 94.105,67.05 h1 r270
  text "D14" at 96.653,67.05 h1 r270
  text "GND" at 99.2,67.05 h1 r270
Mechanical 1:
  lines w0.25: 43.053,55.617 43.053,152.017 ; 46.103,52.567 114.563,52.567 ; 46.103,155.067 114.563,155.067 ; 117.613,55.617 117.613,152.017
  lines w0.254: 43.053,55.617 ccw(c46.103,55.617) 46.103,52.567 ; 43.053,152.017 cw(c46.103,152.017) 46.103,155.067 ; 114.563,52.567 ccw(c114.563,55.617) 117.613,55.617 ; 114.563,155.067 cw(c114.563,152.017) 117.613,152.017